# Altium PCB PeripheralPCB.PcbDoc
Units mm, origin at the board's own origin, x right, y up, seen from the top; angles counter-clockwise.
Board outline 38 x 24 mm, 2 copper layers (Top Layer, Bottom Layer); 10 components, 9 nets, 51 pads, 10 vias.
Unrouted connection lines stored in the file: 1.
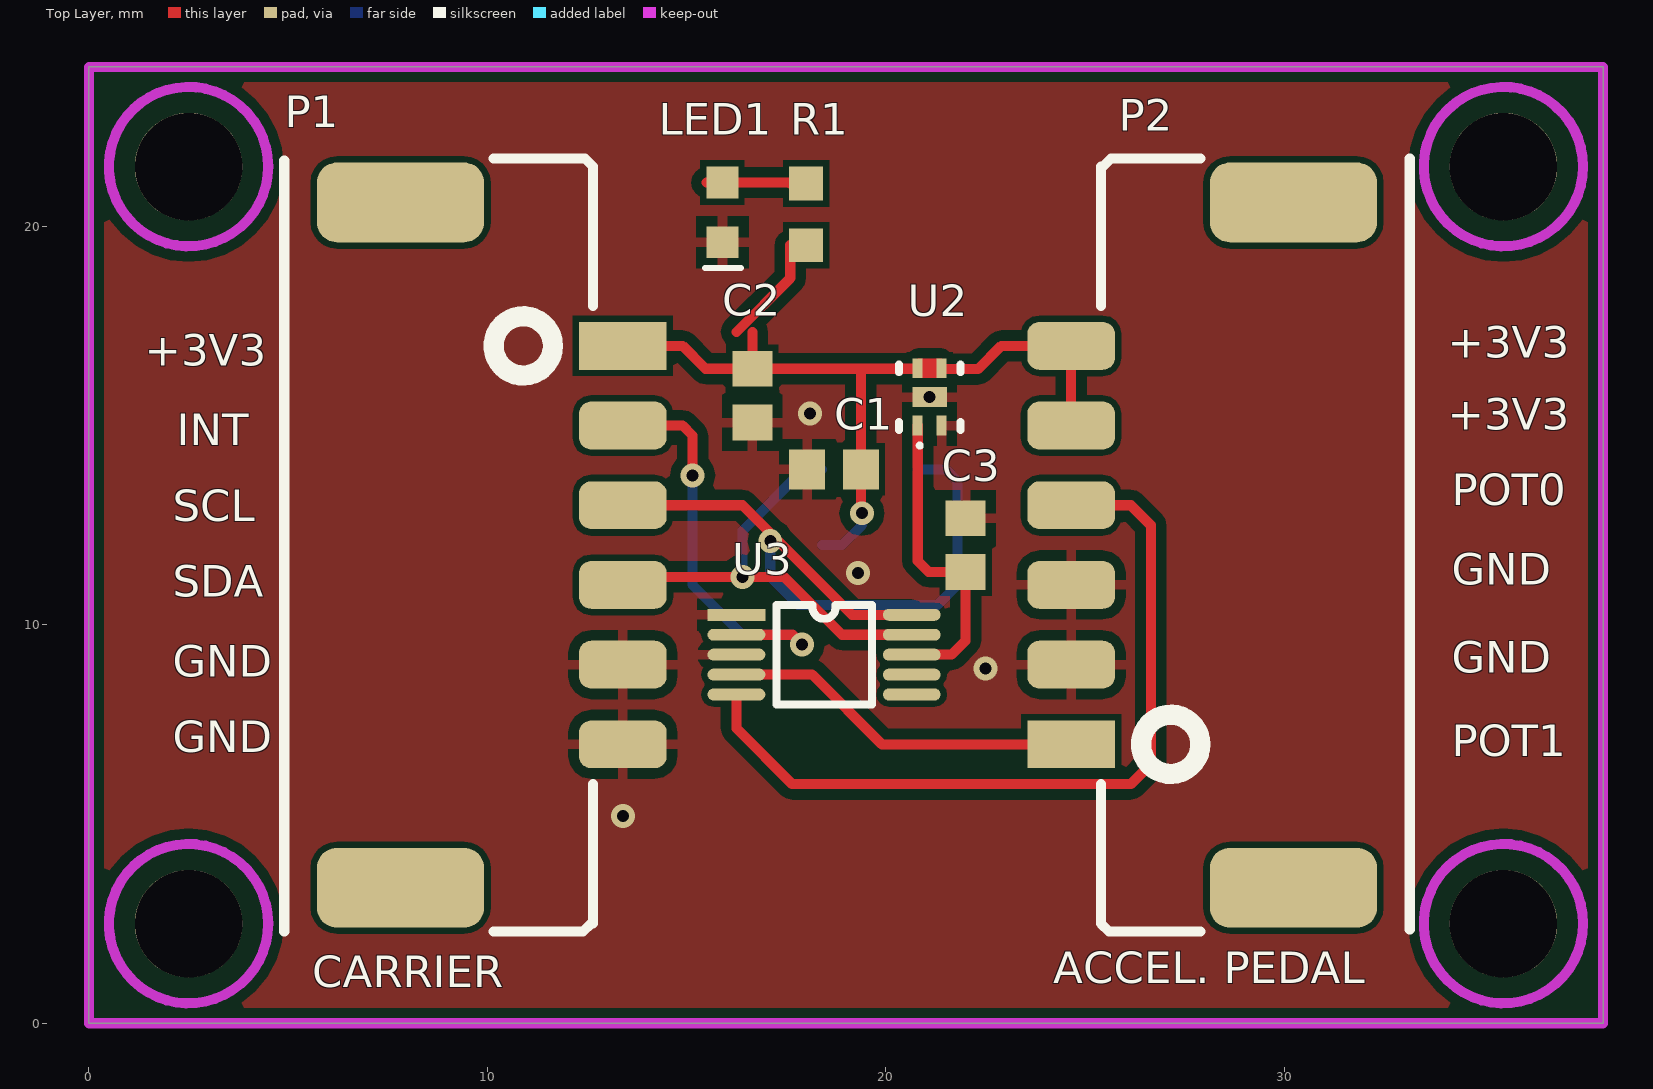
[diagram p0: Top Layer view]
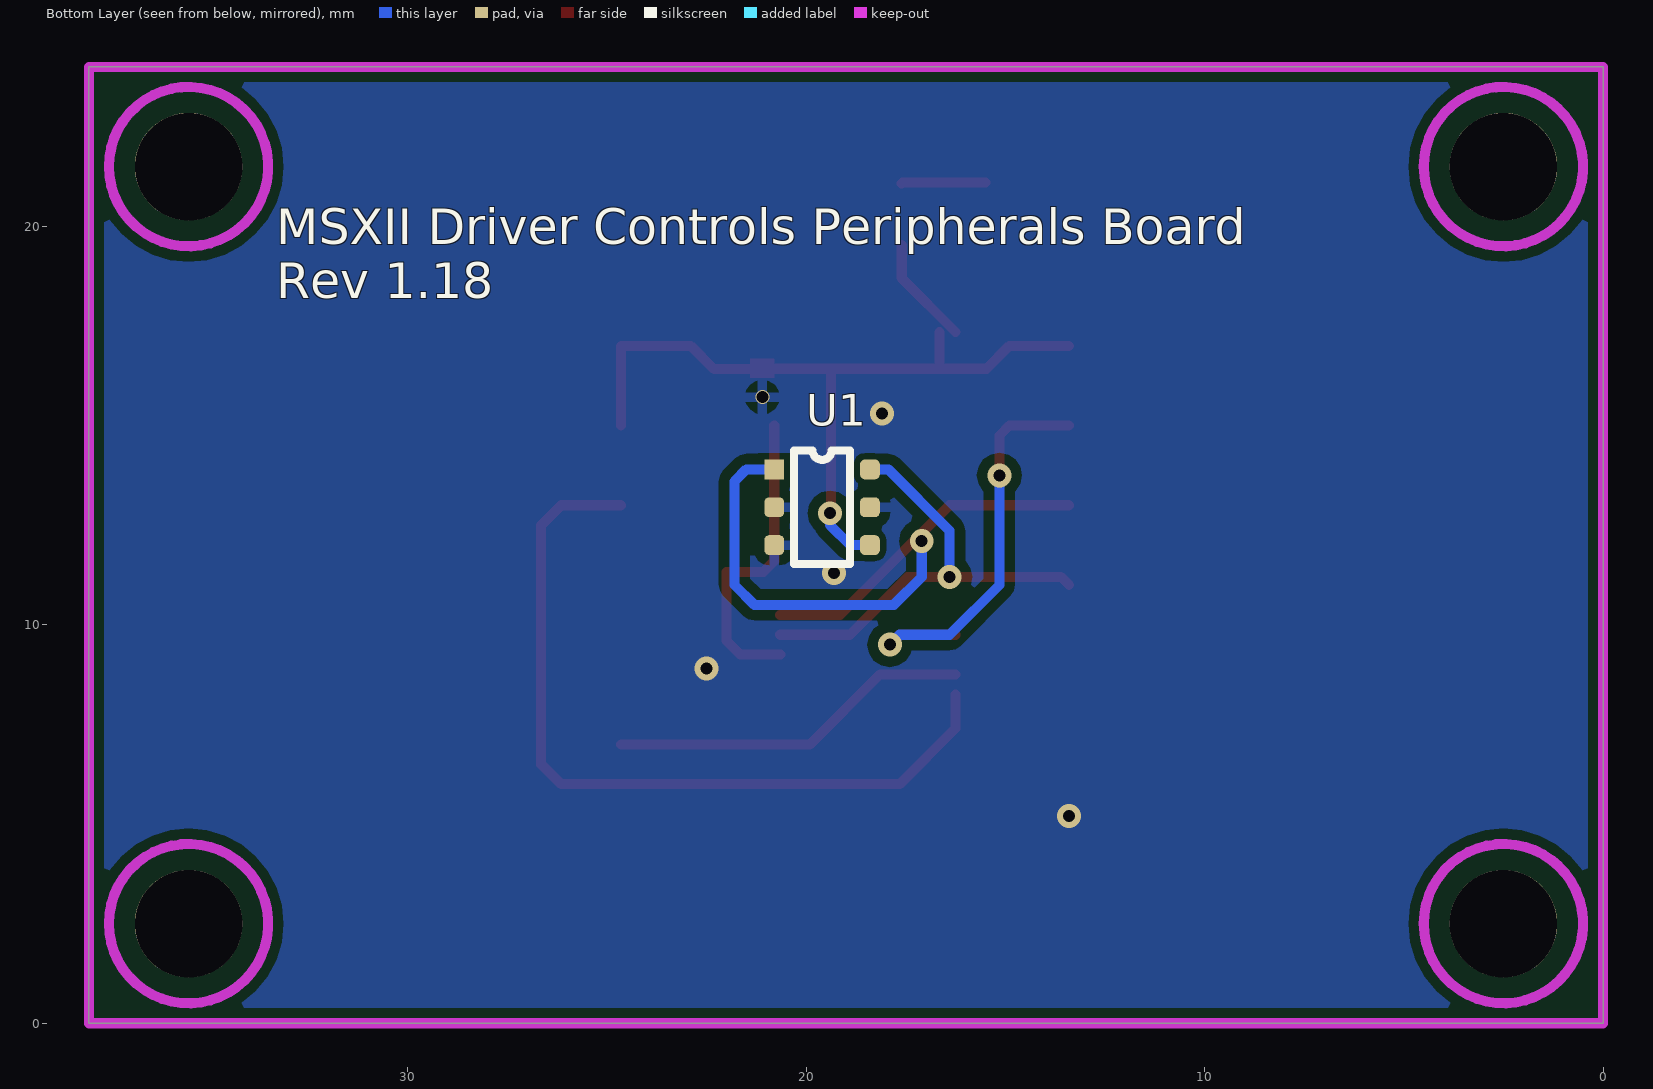
[diagram p1: Bottom Layer view, seen from below]
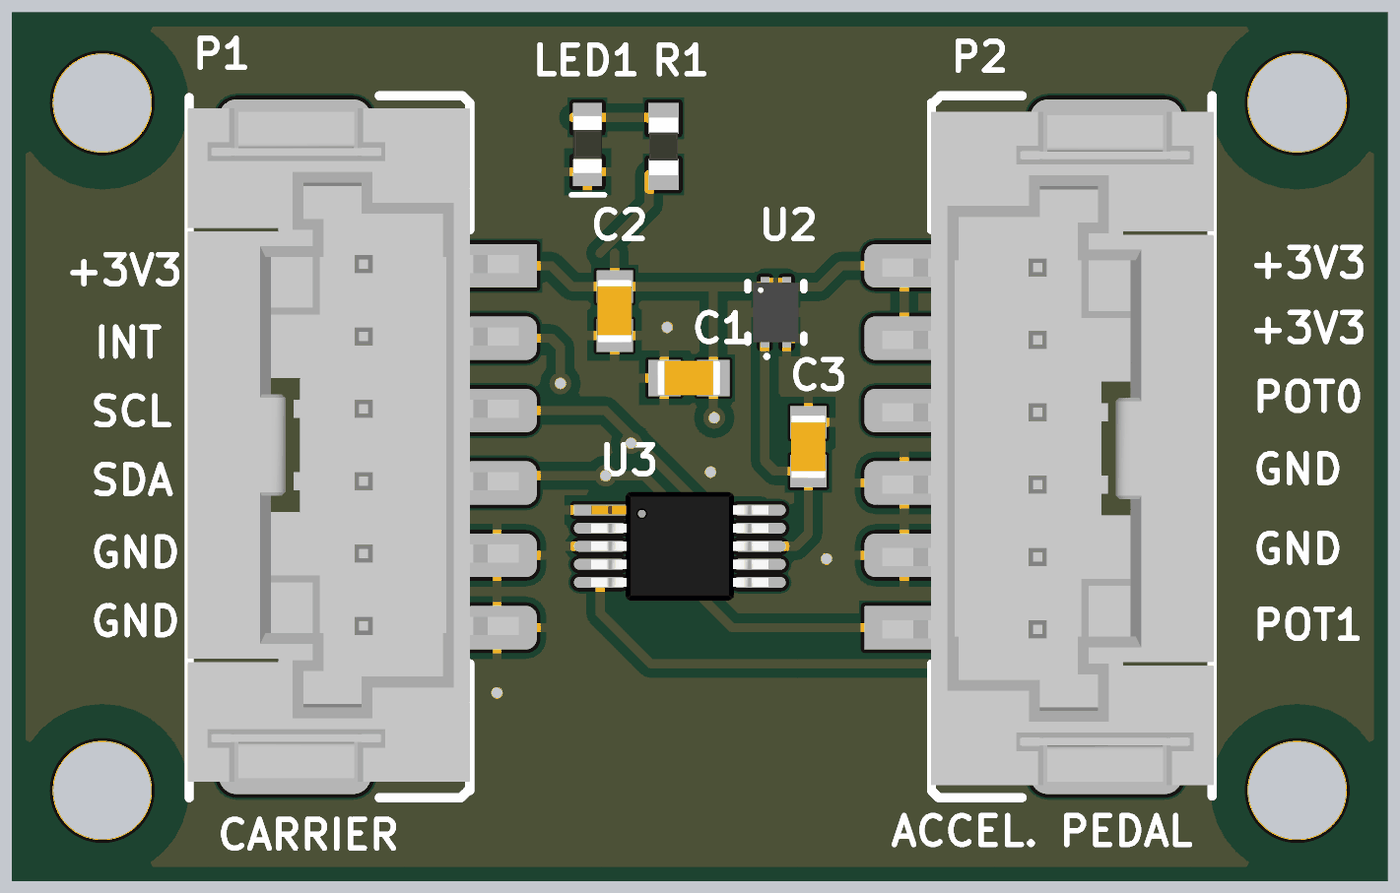
[diagram p2: 3D render of the assembled board from above, using the file's embedded part models]

## Layer stack, top to bottom
Top Solder: solder mask 0.0102, Solder Resist, Dk 3.5
Top Layer: signal copper 0.0356
Dielectric 1: dielectric 0.32, FR-4, Dk 4.8
Bottom Layer: signal copper 0.0356
Bottom Solder: solder mask 0.0102, Solder Resist, Dk 3.5

## Board outline
0,0 38,0 38,24 0,24

## Design rules (kind name [scope] priority, off if disabled: settings)
Clearance [All] p1: gap=0.254 ignorepadtopadclearanceinfootprint=FALSE except(0: Arc-Hole Track-Hole SMDPad-Hole THPad-Hole Via-Hole Fill-Hole Poly-Hole Region-Hole Text-Hole; 0.152: Arc-Arc Arc-Track Arc-SMDPad Track-Track Track-SMDPad SMDPad-SMDPad SMDPad-THPad SMDPad-Fill SMDPad-Poly SMDPad-Region)
PolygonConnect [All] p1: connectstyle=Relief reliefconductorwidth=0.254 reliefentries=4 polygonreliefangle="90 Angle" airgapwidth=0.254
RoutingVias [All] p1: holewidth=0.711 width=1.27 viastyle="Through Hole" minholewidth=0.711 minwidth=1.27 maxholewidth=0.711 maxwidth=1.27
SolderMaskExpansion [All] p1: expansion=0.102
Width [All] p1: maxlimit=0.254 minlimit=0.254 preferedwidth=0.254
30 further rules are at their usual default settings.

## Components (designator, comment, footprint, x,y, rotation, side; value= is the part's Value field where it differs from the comment)
C1 "CAP CER 0.1UF 50V 10% X7R 0603" "CAP, 0603" 18.7,13.9 r180 top
C2 "CAP CER 1UF 50V 10% X7R 0603" "CAP, 0603" 16.65,15.75 r270 top
C3 "CAP CER 1UF 50V 10% X7R 0603" "CAP, 0603" 22,12 r90 top
LED1 "LED GREEN CLEAR 2V 0603" LED_0603 15.89,21.05 r270 top
P1 "DURA-CLIK" "CONN, 6POS DURA-CLIK VERT" 13.4,17 r270 top
P2 "DURA-CLIK" "CONN, 6POS DURA-CLIK VERT" 24.65,7 r90 top
R1 "RES 510 OHM 5% 1/10W 0603" "RES, 0603" 18,20.3 r90 top
U1 "HALL EFFECT" "IC TLV496D MAG SENSOR TSOP-6" 20.8,13.9 r180 bottom
U2 "IC REG LDO 3V 0.2A 4-TDFN" "IC REG LDO 3V 0.2A 4-TDFN" 21.35,14.997 r0 top
U3 "Quad ADC" "IC ADC VSSOP10" 16.25,10.25 r0 top

## Footprints (in the part's own frame and the unit in brackets; to place one, negate y for a bottom-side part, rotate by r counter-clockwise, add the part's x,y. Pads: shape width x height; smd on the part's side, far side on the other; paste and mask are expansions set on the pad)
"CAP, 0603" [mm] "Chip Capacitor, 2-Leads, Body 1.60x0.81mm, IPC Medium Density"
  rect 0.9x1 smd mask+0.076: 1(-0.675,0) 2(0.675,0)
  body extent -0.87,-0.48 0.87,0.48, height 0.9
"CONN, 6POS DURA-CLIK VERT" [mm]
  rect 1.2x2.2 smd: 1(0,0)
  rrect50% 1.2x2.2 smd: 2(2,0) 3(4,0) 4(6,0) 5(8,0) 6(10,0)
  rrect50% 2x4.2 smd: 7(-3.6,-5.58) 7(13.6,-5.58)
  silkscreen extent -4.7,-8.5 14.7,-0.75, body extent -4.35,-8.54 14.25,0.61, height 7.97
"IC ADC VSSOP10" [mm]
  rect 1.45x0.3 smd: 1(0,0)
  oval 1.45x0.3 smd: 2(0,-0.5) 3(0,-1) 4(0,-1.5) 5(0,-2) 6(4.4,-2) 7(4.4,-1.5) 8(4.4,-1) 9(4.4,-0.5) 10(4.4,0)
  silkscreen extent 1,-2.25 3.4,0.25, body extent -0.25,-2.5 4.65,0.5, height 1.15
"IC REG LDO 3V 0.2A 4-TDFN" [mm] "QFN, 4-Leads, Body 1.20x1.60mm, Pitch 0.50mm/1.40mm, Thermal Pad 0.86x0.50mm, IPC Medium Density"
  rect 0.25x0.5 smd: 1(-0.55,0) 2(0.05,0) 3(0.05,1.44) 4(-0.55,1.44)
  rect 0.86x0.5 smd: 5(-0.25,0.715)
  silkscreen extent -1.02,-0.55 0.53,1.54, body extent -0.87,-0.11 0.38,1.54, height 0.6
"IC TLV496D MAG SENSOR TSOP-6" [mm]
  rect 0.5x0.5 smd: 1(0,0)
  rrect50% 0.5x0.5 smd: 2(0,-0.95) 3(0,-1.9) 4(2.4,-1.9) 5(2.4,-0.95) 6(2.4,0)
  silkscreen extent 0.5,-2.38 1.9,0.48
LED_0603 [mm]
  rect 0.8x0.8 smd: 1(-0.05,0.01) 2(1.45,0.01)
  silkscreen extent 2.09,-0.43 2.09,0.48, body extent -0.1,-0.39 1.5,0.41, height 0.55
"RES, 0603" [mm] "Chip Resistor, 2-Leads, Body 1.60x0.80mm, IPC Medium Density"
  rect 0.85x0.85 smd: 1(-0.775,0) 2(0.775,0)
  body extent -0.8,-0.4 0.8,0.4, height 0.55

## Part data
C1: "0.10µF ±10% 50V Ceramic Capacitor X7R 0603 (1608 Metric)", Capacitance=0.1µF, Manufacturer 1="AVX Corporation", Manufacturer Part Number 1=06035C104KAT2A, Operating Temperature="-55°C ~ 125°C", Package / Case="0603 (1608 Metric)", Ratings=-, Supplier Part Number 1=478-5052-1-ND, Temperature Coefficient=X7R, Tolerance=±10%, Voltage=50V, ComponentLink1Description=http://datasheets.avx.com/X7RDielectric.pdf, ComponentLink1URL=http://datasheets.avx.com/X7RDielectric.pdf, Height - Seated (Max)=-, Lead Spacing=-, Lead Style=-, Mounting Type="Surface Mount, MLCC", Packaging="Cut Tape (CT)", Part Status=Active, Size / Dimension="0.063\" L x 0.032\" W (1.60mm x 0.81mm)", Supplier 1=Digi-Key, Thickness (Max)="0.035\" (0.90mm)"
C2 C3: "1µF ±10% 50V Ceramic Capacitor X7R 0603 (1608 Metric)", Capacitance=1µF, Manufacturer 1="Taiyo Yuden", Manufacturer Part Number 1=UMK107AB7105KA-T, Operating Temperature="-55°C ~ 125°C", Package / Case="0603 (1608 Metric)", Ratings=-, Supplier Part Number 1=587-3247-1-ND, Temperature Coefficient=X7R, Tolerance=±10%, Voltage=50V, ComponentLink1Description=http://www.yuden.co.jp/productdata/catalog/en/mlcc_all_e.pdf, ComponentLink1URL=http://www.yuden.co.jp/productdata/catalog/en/mlcc_all_e.pdf, Height - Seated (Max)=-, Lead Spacing=-, Lead Style=-, Mounting Type="Surface Mount, MLCC", Packaging="Cut Tape (CT)", Part Status=Active, Size / Dimension="0.063\" L x 0.031\" W (1.60mm x 0.80mm)", Supplier 1=Digi-Key, Thickness (Max)="0.037\" (0.95mm)"
LED1: "Green 572nm LED Indication - Discrete 2V 0603 (1608 Metric)", Color=Green, Current - Test=20mA, Lens Color=Colorless, Manufacturer="Wurth Electronics Inc.", Manufacturer Part Number=150060VS75000, Millicandela Rating=40mcd, Package / Case="0603 (1608 Metric)", Supplier Device Package=0603, Supplier Part Number 1=732-4980-1-ND, Voltage - Forward (Vf) (Typ)=2V, Category=Optoelectronics, ComponentLink1Description=http://katalog.we-online.de/led/datasheet/150060VS75000.pdf, ComponentLink1URL=http://katalog.we-online.de/led/datasheet/150060VS75000.pdf, Features=-, Height (Max)=0.80mm, Lens Style/Size="Rectangle with Flat Top, 1.10mm x 0.70mm", Lens Transparency=Clear, Mounting Type="Surface Mount", Packaging="Cut Tape (CT)", Part Status=Active, Pricing 1="1=0.21, 100=0.1617, 500=0.13964 (CAD)", RoHS="RoHS Compliant", Size / Dimension="1.60mm L x 0.80mm W", Stock 1=9408, Supplier 1=Digi-Key, Viewing Angle=140°, Wavelength - Dominant=570nm, Wavelength - Peak=572nm
P1 P2: library part "CONN 6POS DURA-CLIK 0.079\"", "6 Positions Header, Shrouded Connector 0.079\" (2.00mm) Surface Mount, Vertical Tin", Current Rating=-, Insulation Color=Natural, Manufacturer=Molex, Manufacturer Part Number=5600200820, Supplier Part Number 1=WM10866CT-ND, Applications="Automotive, Industrial", Category="Connectors, Interconnects", ComponentLink1Description=http://www.molex.com/pdm_docs/sd/5600200220_sd.pdf, ComponentLink1URL=http://www.molex.com/pdm_docs/sd/5600200220_sd.pdf, Connector Type=Header, Contact Finish - Mating=Tin, Contact Finish - Post=Tin, Contact Finish Thickness - Mating=-, Contact Finish Thickness - Post=-, Contact Length - Mating=-, Contact Length - Post=-, Contact Material="Copper Alloy", Contact Shape=Square, Contact Type="Male Pin", Fastening Type="Latch Lock", Features="Solder Retention", Ingress Protection=-, Insulation Height="0.315\" (8.00mm)", Insulation Material="Polyamide (PA), Nylon", Mated Stacking Heights=9.3mm, Material Flammability Rating=-, Mounting Type="Surface Mount", Number of Positions=6, Number of Positions Loaded=All, Number of Rows=1, Operating Temperature=-, Overall Contact Length=-, Packaging="Cut Tape (CT)", Part Status=Active, Pitch - Mating="0.079\" (2.00mm)", Pricing 1="1=1.76, 10=1.542, 25=1.4512, 50=1.391, 100=1.3305, 250=1.20956 (CAD)", RoHS="RoHS Compliant", Row Spacing - Mating=-, Shrouding="Shrouded - 4 Wall", Stock 1=3826, Style="Board to Cable/Wire", Supplier 1=Digi-Key, Termination=Solder, Voltage Rating=-
R1: "RES SMD 510 OHM 5% 1/10W 0603", Manufacturer 1=Yageo, Manufacturer Part Number 1=RC0603JR-07510RL, Operating Temperature="-55°C ~ 155°C", Package / Case="0603 (1608 Metric)", Power=1/10W, Resistance=510, Supplier Device Package=0603, Supplier Part Number 1=311-510GRCT-ND, Temperature Coefficient=±100ppm/°C, Tolerance=±5%, ComponentLink1Description=http://www.yageo.com/documents/recent/PYu-RC_Group_51_RoHS_L_7.pdf, ComponentLink1URL=http://www.yageo.com/documents/recent/PYu-RC_Group_51_RoHS_L_7.pdf, Composition="Thick Film", Failure Rate=-, Height - Seated (Max)="0.022\" (0.55mm)", Packaging="Cut Tape (CT)", Part Status=Active, Size / Dimension="0.063\" L x 0.031\" W (1.60mm x 0.80mm)", Supplier 1=Digi-Key
U1: library part "IC SENSOR HALL I2C TSOP-6", "Hall Effect Sensor Linear, Rotary Position External Magnet Not Included SMD (SMT) Tab", Manufacturer="Infineon Technologies", Manufacturer Part Number=TLV493DA1B6HTSA2, Operating Temperature="-40°C ~ 125°C", Resistance (Ohms)=-, Supplier Part Number 1=TLV493DA1B6HTSA2CT-ND, Voltage - Supply="2.7 V ~ 3.5 V", Actuator Type="External Magnet Not Included", Category="Sensors, Transducers", ComponentLink1Description=http://www.infineon.com/dgdl/Infineon-TLV493D-A1B6-DS-v01_00-EN.pdf?fileId=5546d462525dbac40152a6b85c760e80, ComponentLink1URL=http://www.infineon.com/dgdl/Infineon-TLV493D-A1B6-DS-v01_00-EN.pdf?fileId=5546d462525dbac40152a6b85c760e80, For Measuring="Linear, Rotary Position", Linearity=-, Linear Range=-, Mounting Type="Surface Mount", Output=I²C, Output Signal=-, Part Status=Active, Pricing 1="1=2.75, 5=2.654, 10=2.155, 25=1.8564, 50=1.608, 100=1.4587, 500=1.22668, 1000=1.09407 (CAD)", Resistance Tolerance=-, RoHS="RoHS Compliant", Rotation Angle - Electrical, Mechanical="0° ~ 360°, Continuous", Stock 1=8466, Supplier 1=Digi-Key, Technology="Hall Effect", Termination Style="SMD (SMT) Tab"
U2: Current - Limit (Min)=250mA, Current - Output=200mA, Manufacturer="Microchip Technology", Manufacturer Part Number=MIC94310-PYMT-TR, Operating Temperature="-40°C ~ 125°C", Package / Case="4-UFDFN Exposed Pad", Supplier Device Package="4-TDFN (1.2x1.6)", Supplier Part Number 1=576-4761-1-ND, Voltage - Dropout (Typical)="0.04V @ 200mA", Voltage - Input="Up to 3.6V", Voltage - Output=3V, Category="Integrated Circuits (ICs)", ComponentLink1Description=http://www.microchip.com/mymicrochip/filehandler.aspx?ddocname=en580409, ComponentLink1URL=http://www.microchip.com/mymicrochip/filehandler.aspx?ddocname=en580409, Mounting Type="Surface Mount", Packaging="Cut Tape (CT)", Part Status=Active, Pricing 1="1=0.45, 25=0.3708, 100=0.3386 (CAD)", Regulator Topology="Positive Fixed", RoHS="RoHS Compliant", Stock 1=4802, Supplier 1=Digi-Key
U3: library part "IC ADC 12-BIT VSSOP-10", "12 Bit Analog to Digital Converter 4 Input 1 Sigma-Delta 10-VSSOP", Manufacturer="Texas Instruments", Manufacturer Part Number=ADS1015IDGSR, Operating Temperature="-40°C ~ 125°C", Package / Case="10-TFSOP, 10-MSOP (0.118\", 3.00mm Width)", Supplier Device Package=10-VSSOP, Supplier Part Number 1=296-41185-1-ND, Voltage - Supply, Analog="2 V ~ 5.5 V", Architecture=Sigma-Delta, Category="Integrated Circuits (ICs)", ComponentLink1Description=http://www.ti.com/lit/ds/symlink/ads1013.pdf, ComponentLink1URL=http://www.ti.com/lit/ds/symlink/ads1013.pdf, Configuration=MUX-PGA-ADC, Data Interface=I²C, Features="PGA, Selectable Address", Input Type="Differential, Single Ended", Number of A/D Converters=1, Number of Bits=12, Number of Inputs="2, 4", Packaging="Cut Tape (CT)", Part Status=Active, Pricing 1="1=4.25, 10=3.807, 100=3.1194, 500=2.65552, 1000=2.23959 (CAD)", Ratio - S/H:ADC=-, Reference Type=Internal, RoHS="RoHS Compliant", Sampling Rate (Per Second)=3.3k, Stock 1=4084, Supplier 1=Digi-Key, Voltage - Supply, Digital="2 V ~ 5.5 V"

## Free pads (board coordinates)
  round 2.7 hole 2.7: ""(2.5,2.5) ""(2.5,21.5) ""(35.5,2.5) ""(35.5,21.5)

## Via types
v1: diameter 0.6, hole 0.3, Top Layer to Bottom Layer, tented both sides, 9 vias
v2: diameter 0.35, hole 0.3, Top Layer to Bottom Layer, 1 vias

## Nets (pads, with @x,y where several pads share a name; then routed paths per layer and width w, separated by ;. In a path a pad name is that pad's centre, name@x,y a point inside that pad or via, vN(x,y) a via of type N, cw(c..) or ccw(c..) an arc to the next point about the centre after c; other vN are vias at no path point)
+3V: C3.1 U2.1 U3.8 | length 7.9
  Top Layer w0.254: U3.8 21.65,9.25 22,9.6 C3.1 21.075,11.325 20.8,11.6 U2.1
+3V3: C1.1 C2.1 P1.1 P2.5 P2.6 R1.1 U1.4 U2.3 U2.4 | length 21.9
  Top Layer w0.254: P1.1 14.9,17 15.475,16.425 C2.1 ; 16.25,17.35 17.6,18.7 R1.1@17.6,19.525 ; 16.65,17.35 C2.1 ; v1(19.4,12.8) 19.375,12.825 C1.1 19.375,16.4 19.4,16.425 ; U2.4@20.8,16.425 19.4,16.425 ; U2.3@21.4,16.415 22.315,16.415 22.9,17 P2.6 P2.5 ; C2.1 19.4,16.425
  Bottom Layer w0.254: U1.4 18.9,12 19.4,12.5 v1(19.4,12.8)
ADC_INTERRUPT: P1.2 U3.2 | length 10.7
  Top Layer w0.254: P1.2 14.9,15 15.15,14.75 v1(15.15,13.75) ; U3.2 17.65,9.75 v1(17.9,9.5)
  Bottom Layer w0.254: v1(15.15,13.75) 15.15,11 16.4,9.75 17.65,9.75 v1(17.9,9.5)
DEVICE_SCL: P1.3 U1.1 U3.10 | length 18.2
  Top Layer w0.254: P1.3 16.4,13 19.15,10.25 U3.10
  Bottom Layer w0.254: v1(17.1,12.1) 17.1,11.2 17.8,10.5 21.3,10.5 21.8,11 21.8,13.6 21.5,13.9 U1.1
DEVICE_SDA: P1.4 U1.6 U3.9 | length 11.7
  Top Layer w0.254: P1.4 13.6,11.2 v1(16.4,11.2) 17.45,11.2 18.9,9.75 U3.9
  Bottom Layer w0.254: v1(16.4,11.2) 16.4,12.363 17.937,13.9 U1.6
GND: C1.2 C2.2 C3.2 LED1.2 P1.5 P1.6 P2.2 P2.3 U1.2 U1.3 U1.5 U2.2 U2.5 U3.1 U3.3
  other v1: 13.4,5.2 22.5,8.9 19.3,11.3 18.1,15.3
  other v2: 21.1,15.713
NetLED1_1: LED1.1 R1.2 | length 2.1
  Top Layer w0.254: LED1.1@15.5,21.1 17.575,21.1 R1.2@17.6,21.075
Potentiometer_1: P2.4 U3.5 | length 20.2
  Top Layer w0.254: U3.5 16.25,7.4 17.65,6 26.15,6 26.65,6.5 26.65,12.5 26.15,13 P2.4
Potentiometer_2: P2.1 U3.4 | length 9.1
  Top Layer w0.254: U3.4 18.15,8.75 19.9,7 P2.1
pads on no net: P1.7 P2.7 U3.6 U3.7

## Polygon pours and split planes (outlines as drawn)
GND on Bottom Layer "Bottom Layer-GND" (solid, remove dead copper, pour order 0): 0,0 38,0 38,24 0,24
GND on Top Layer "Top Layer-GND" (solid, remove dead copper, pour order 2): 0,0 38,0 38,24 0,24

## Keep-outs
Keep-Out Layer:
  circle w0.254: c35.5,2.5 r2
  circle w0.254: c35.5,21.5 r2
  circle w0.254: c2.5,2.5 r2
  circle w0.254: c2.5,21.5 r2
  lines w0.254: 0,0 0,24 38,24 38,0 0,0

## Other copper
Top Layer:
  region net +3V3: 20.8,16.675 21.4,16.675 21.4,16.2 20.8,16.2

## Silkscreen, mask and mechanical layers (free items; w line width, h text height)
Top Overlay:
  text "+3V3" at 34.1,16.7 h0.8
  text "+3V3" at 1.4,16.5 h0.8
  text "+3V3" at 34.1,14.9 h0.8
  text "INT" at 2.2,14.5 h0.8
  text "POT0" at 34.2,13 h0.8
  text "SCL" at 2.1,12.6 h0.8
  text "GND" at 34.2,11 h0.8
  text "SDA" at 2.1,10.7 h0.8
  text "GND" at 34.2,8.8 h0.8
  text "GND" at 2.1,8.7 h0.8
  text "GND" at 2.1,6.8 h0.8
  text "POT1" at 34.2,6.7 h0.8
  text "ACCEL. PEDAL" at 24.2,1 h0.8
  text "CARRIER" at 5.6,0.9 h0.8
Bottom Overlay:
  text "MSXII Driver Controls Peripherals Board / Rev 1.18" at 33.3,18.2 h0.9